# EAGLE board capacitor-void-test (EAGLE 9.4.1)
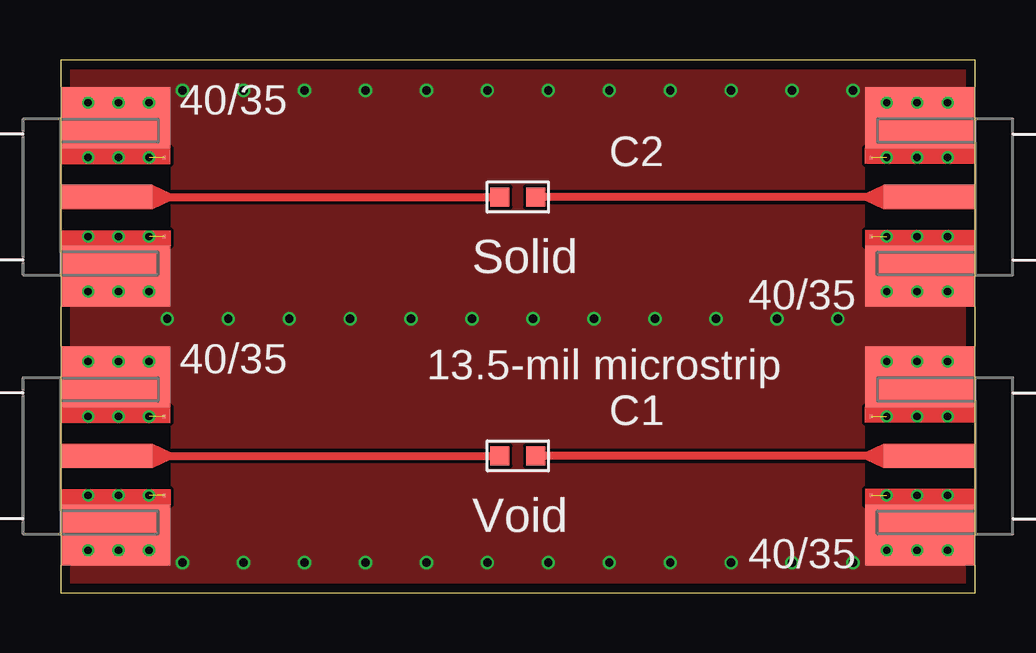
[diagram p0: board, top side]
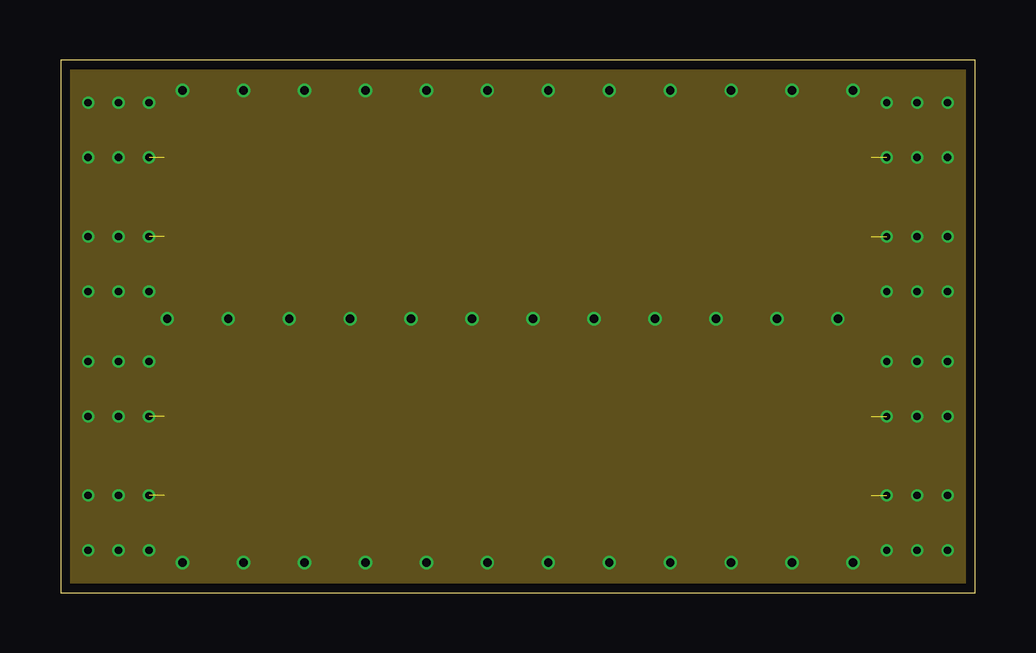
[diagram p1: board, inner layer Route2]
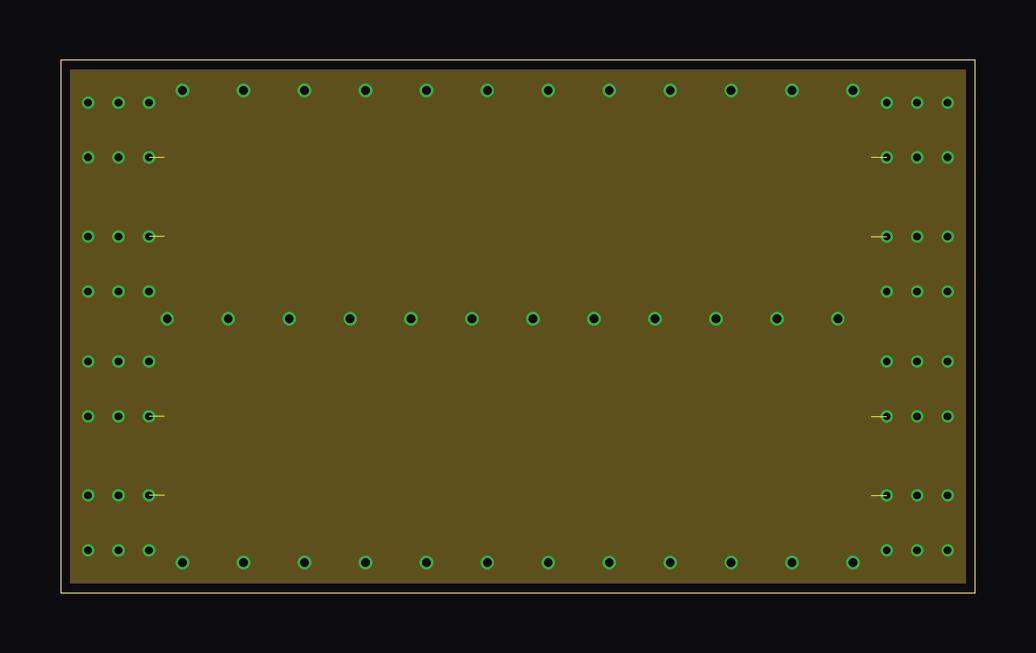
[diagram p2: board, inner layer Route15]
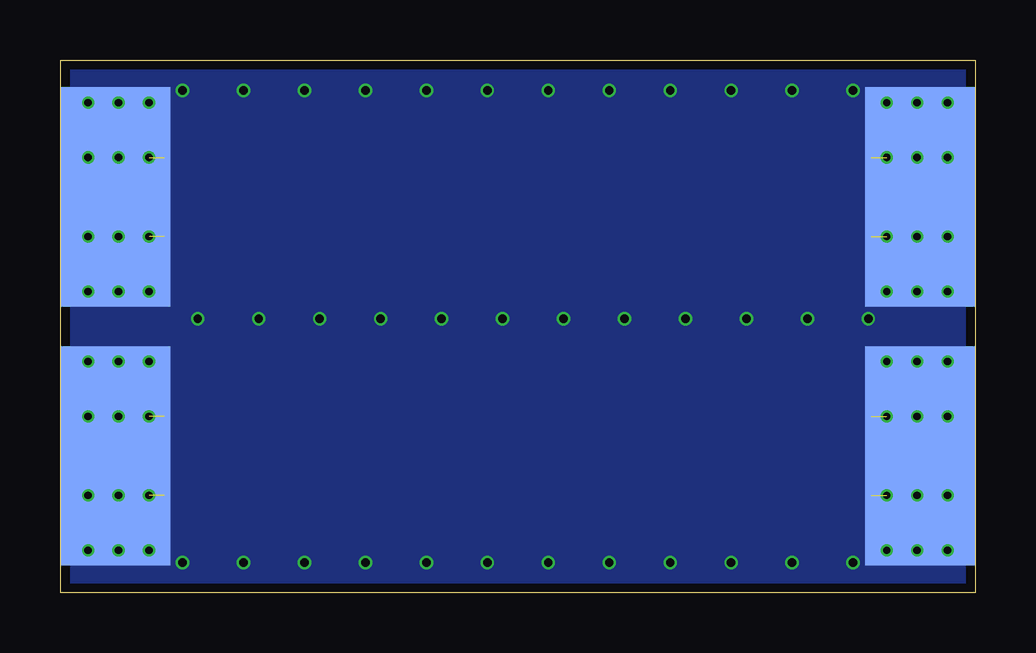
[diagram p3: board, bottom side, seen from below]

Size 38.1 x 22.23 mm. Coordinates in mm from the lower left corner, seen from the top.
Outline: 0,0 38.1,0 38.1,22.23 0,22.23 0,0
Copper layers (1*2*15*16): Top 0.035559375mm / dielectric 0.17018125mm / Route2 0.01778125mm / dielectric 47mil / Route15 0.01778125mm / dielectric 0.17018125mm / Bottom 0.035559375mm
Design rules "oshpark-4layer *": minimum track width 5mil, minimum drill 10mil, track to track 5mil, track to pad 5mil, pad to pad 5mil, via to via 5mil, smd to smd 5mil, copper to edge 15mil, drill to drill 6mil, minimum pad ring 4mil, minimum via ring 4mil, stop-mask expansion 2.5mil, vias tented up to drill 20mil, thermal gap 10mil
Net classes: 1 50-ohm: clearance 2.54 mm

## Footprints (pad centres in the part's own frame; a part is rotated, then mirrored left to right if it is on the bottom)
C0603_VOID = smd 0.8 x 0.8: P$1 -0.75,0; P$2 0.75,0
C0603 = smd 0.8 x 0.8: P$1 -0.75,0; P$2 0.75,0
SMA_EDGE_LAUNCH_4L_4035_TAPER = smd 4.572 x 9.144 bottom: BOTTOM_GND 2.286,0 | smd 3.81 x 1.016: CENTER@1 1.905,0 | drill 0.3: GND@1 1.143,3.937; GND@2 3.683,3.937; GND@3 1.143,1.651; GND@4 3.683,1.651; GND@5 1.143,-1.651; GND@6 3.683,-1.651; GND@7 1.143,-3.937; GND@8 3.683,-3.937; GND@14 2.413,3.937; GND@15 2.413,-3.937; GND@16 2.413,-1.651; GND@17 2.413,1.651 | smd 4.572 x 2.54: GND_PAD1 2.286,3.302; GND_PAD2 2.286,-3.302 | smd 0.127 x 0.127: P$1 4.318,1.651; P$2 4.318,-1.651

## Placement (x,y rotation side)
C1  [C0603_VOID]  19.05,5.71 0 top
C2  [C0603]  19.05,16.51 0 top
J1  [SMA_EDGE_LAUNCH_4L_4035_TAPER]  0,5.71 0 top
J2  [SMA_EDGE_LAUNCH_4L_4035_TAPER]  38.1,5.71 180 top
J3  [SMA_EDGE_LAUNCH_4L_4035_TAPER]  0,16.51 0 top
J4  [SMA_EDGE_LAUNCH_4L_4035_TAPER]  38.1,16.51 180 top

## Library data of the parts
C1 C2 J1-J4 = sma_footprint_2l

## Nets
GND: J1.BOTTOM_GND J1.GND@1 J1.GND@2 J1.GND@3 J1.GND@4 J1.GND@5 J1.GND@6 J1.GND@7 J1.GND@8 J1.GND@14 J1.GND@15 J1.GND@16 J1.GND@17 J1.GND_PAD1 J1.GND_PAD2 J1.P$1 J1.P$2 J2.BOTTOM_GND J2.GND@1 J2.GND@2 J2.GND@3 J2.GND@4 J2.GND@5 J2.GND@6 J2.GND@7 J2.GND@8 J2.GND@14 J2.GND@15 J2.GND@16 J2.GND@17 J2.GND_PAD1 J2.GND_PAD2 J2.P$1 J2.P$2 J3.BOTTOM_GND J3.GND@1 J3.GND@2 J3.GND@3 J3.GND@4 J3.GND@5 J3.GND@6 J3.GND@7 J3.GND@8 J3.GND@14 J3.GND@15 J3.GND@16 J3.GND@17 J3.GND_PAD1 J3.GND_PAD2 J3.P$1 J3.P$2 J4.BOTTOM_GND J4.GND@1 J4.GND@2 J4.GND@3 J4.GND@4 J4.GND@5 J4.GND@6 J4.GND@7 J4.GND@8 J4.GND@14 J4.GND@15 J4.GND@16 J4.GND@17 J4.GND_PAD1 J4.GND_PAD2 J4.P$1 J4.P$2
N$1 [50-ohm]: C1.P$2 J2.CENTER@1
N$2 [50-ohm]: C1.P$1 J1.CENTER@1
N$3 [50-ohm]: C2.P$2 J4.CENTER@1
N$4 [50-ohm]: C2.P$1 J3.CENTER@1

## Tracks (layer width: path | path; a pad name or v marks a point on that pad's centre or on a via)
GND  (via drill 0.35)  (8 unrouted)
  other vias: 5.08,20.95 7.62,20.95 10.16,20.95 12.7,20.95 15.24,20.95 17.78,20.95 20.32,20.95 22.86,20.95 25.4,20.95 27.94,20.95 30.48,20.95 33.02,20.95 5.08,1.27 7.62,1.27 10.16,1.27 12.7,1.27 15.24,1.27 17.78,1.27 20.32,1.27 22.86,1.27 25.4,1.27 27.94,1.27 30.48,1.27 33.02,1.27 4.45,11.43 6.99,11.43 9.53,11.43 12.06,11.43 14.61,11.43 17.14,11.43 19.68,11.43 22.23,11.43 24.77,11.43 27.3,11.43 29.84,11.43 32.38,11.43
  pour Top (no thermals): 0,0 38.1,0 38.1,22.23 0,22.23
  pour Bottom (no thermals): 0,0 38.1,0 38.1,22.23 0,22.23
  pour Route15 (no thermals): 0,0 38.1,0 38.1,22.23 0,22.23
  pour Route2 (no thermals): 0,0 38.1,0 38.1,22.23 0,22.23
N$1
  Top 0.343: J2.CENTER@1 C1.P$2
N$2
  Top 0.343: J1.CENTER@1 C1.P$1
N$3
  Top 0.343: J4.CENTER@1 C2.P$2
N$4
  Top 0.343: J3.CENTER@1 C2.P$1

## Text on the board
tPlace: Solid | 13.5-mil microstrip | Void